# Altium PCB broken_sodimm_dq_widths.PcbDoc (part 6 of 7)
Units mm, origin at the board's own origin, x right, y up, seen from the top; angles counter-clockwise.
Board outline 69.63 x 30.03 mm, 8 copper layers (TOP, SPLIT2, S3, VDD4, S5, S6, SPLIT7, BOTTOM), stack 1.2 mm thick; 199 components, 229 nets, 1321 pads, 785 vias.
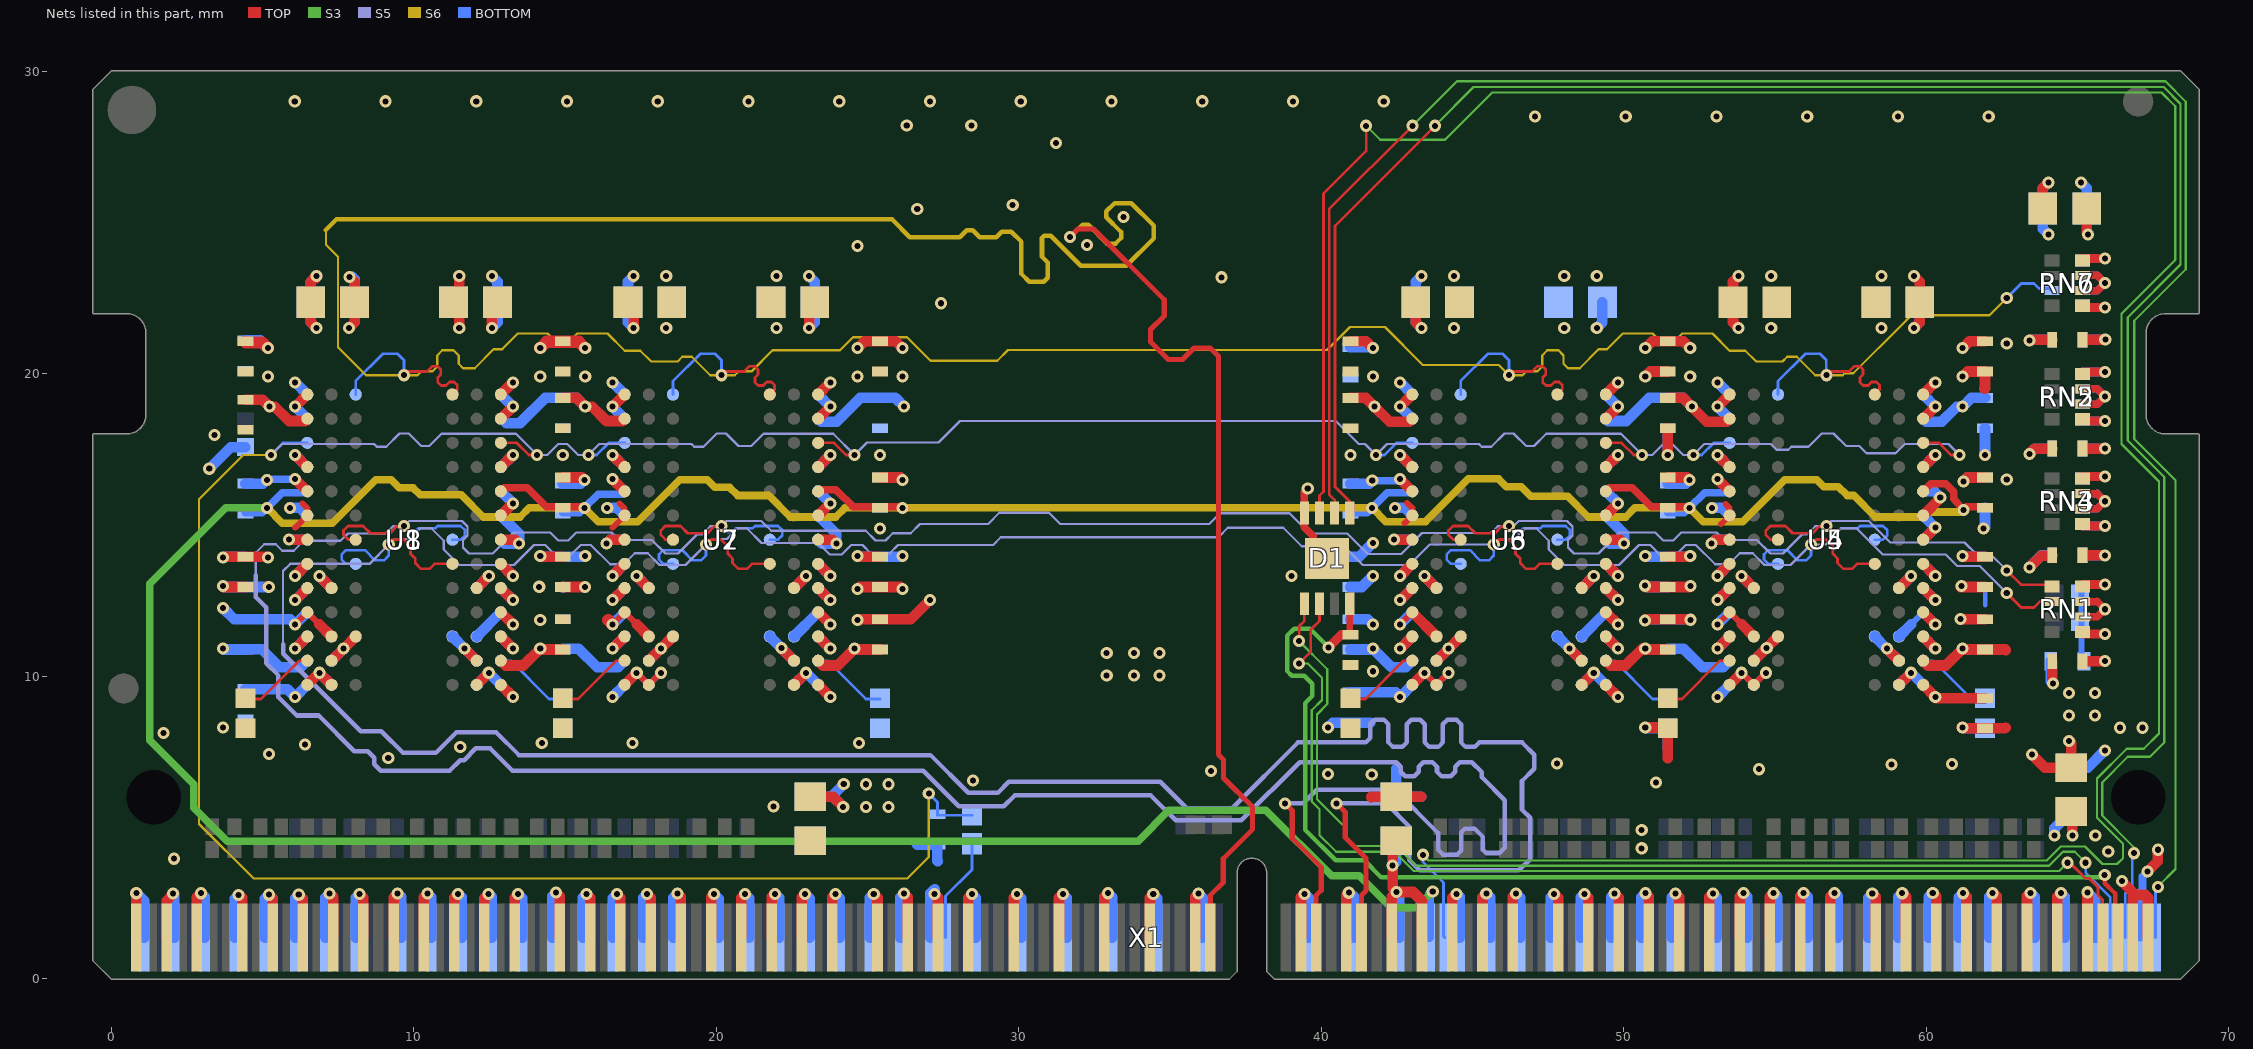
[diagram p11: the nets of this part, all layers, seen from the top]

## Via types
v1: diameter 0.4, hole 0.2, TOP to BOTTOM, tented both sides, 785 vias

## Nets (pads, with @x,y where several pads share a name; then routed paths per layer and width w, separated by ;. In a path a pad name is that pad's centre, name@x,y a point inside that pad or via, vN(x,y) a via of type N, cw(c..) or ccw(c..) an arc to the next point about the centre after c; other vN are vias at no path point) (continued)
GND: C1.2 C2.1 C13.1 C14.1 C15.1 C16.1 C17.1 C18.1 C19.1 C20.1 C21.1 C22.1 C30.1 C31.1 C32.1 C33.1 C34.1 C35.1 C36.1 C37.1 C38.1 C39.1 C40.1 C41.1 C42.1 C43.1 C44.1 C45.1 C46.1 C47.1 C48.1 C49.1 C50.1 C51.1 C52.1 C53.1 C54.1 C55.1 C58.1 C59.1 C60.1 C61.1 C62.1 C63.1 C64.1 C65.1 C66.1 C67.1 C68.1 C69.1 C70.1 C71.1 C72.1 C73.1 C74.1 C75.1 C76.1 C77.1 C78.1 C79.1 C80.1 C81.1 D1.4 D1.9 R94.1 R95.1 R96.1 R97.1 R98.1 R99.1 R100.1 R101.1 U1.A2 U1.A8 U1.A9 U1.C8 U1.D1 U1.D9 U1.E1 U1.E9 U1.G1 U1.G9 U1.H9 U1.K1 U1.K9 U1.N1 U2.A2 U2.A8 U2.A9 U2.C8 U2.D1 U2.D9 U2.E1 U2.E9 U2.G1 U2.G9 U2.H9 U2.K1 U2.K9 U2.N1 U3.A2 U3.A8 U3.A9 U3.C8 U3.D1 U3.D9 U3.E1 U3.E9 U3.G1 U3.G9 U3.H9 U3.K1 U3.K9 U3.N1 U4.A2 U4.A8 U4.A9 U4.C8 U4.D1 U4.D9 U4.E1 U4.E9 U4.G1 U4.G9 U4.H9 U4.K1 U4.K9 U4.N1 U5.A2 U5.A8 U5.A9 U5.C8 U5.D1 U5.D9 U5.E1 U5.E9 U5.G1 U5.G9 U5.H9 U5.K1 U5.K9 U5.N1 U6.A2 U6.A8 U6.A9 U6.C8 U6.D1 U6.D9 U6.E1 U6.E9 U6.G1 U6.G9 U6.H9 U6.K1 U6.K9 U6.N1 U7.A2 U7.A8 U7.A9 U7.C8 U7.D1 U7.D9 U7.E1 U7.E9 U7.G1 U7.G9 U7.H9 U7.K1 U7.K9 U7.N1 U8.A2 U8.A8 U8.A9 U8.C8 U8.D1 U8.D9 U8.E1 U8.E9 U8.G1 U8.G9 U8.H9 U8.K1 U8.K9 U8.N1 X1.1 X1.2 X1.5 X1.6 X1.9 X1.10 X1.14 X1.15 X1.18 X1.19 X1.22 X1.23 X1.26 X1.27 X1.30 X1.31 X1.35 X1.36 X1.39 X1.40 X1.43 X1.44 X1.47 X1.48 X1.51 X1.52 X1.56 X1.57 X1.60 X1.61 X1.64 X1.65 X1.68 X1.69 X1.72 X1.73 X1.77 X1.78 X1.81 X1.82 X1.85 X1.86 X1.89 X1.90 X1.93 X1.94 X1.98 X1.99 X1.102 X1.103 X1.106 X1.107 X1.167 X1.168 X1.171 X1.172 X1.175 X1.176 X1.180 X1.181 X1.184 X1.185 X1.188 X1.189 X1.192 X1.193 X1.196 X1.197 X1.201 X1.202 X1.205 X1.206 X1.209 X1.210 X1.213 X1.214 X1.217 X1.218 X1.222 X1.223 X1.226 X1.227 X1.230 X1.231 X1.234 X1.235 X1.238 X1.239 X1.243 X1.244 X1.247 X1.248 X1.251 X1.252 | length 267.1
  TOP w0.2: v1(6.073,11.717) U1.D9@6.473,12.117 6.873,11.717 ; 6.073,14.917 U1.H9@6.473,15.317 6.473,15.555 6.318,15.71 ; v1(16.563,11.717) U2.D9@16.963,12.117 17.363,11.717 ; 16.563,14.917 U2.H9@16.963,15.317 16.963,15.545 16.793,15.715 ; v1(17.363,10.117) U2.A8@17.763,9.717 v1(18.163,10.117) ; v1(42.603,11.717) U3.D9@43.003,12.117 ; 42.753,15.067 U3.H9@43.003,15.317 43.003,15.556 42.833,15.726 ; v1(43.403,10.117) U3.A8@43.803,9.717 v1(44.203,10.117) ; v1(53.093,11.717) U4.D9@53.493,12.117 53.893,11.717 ; 53.212,15.036 U4.H9@53.493,15.317 53.493,15.56 53.351,15.702 ; v1(53.893,10.117) U4.A8@54.293,9.717 v1(54.693,10.117)
  TOP w0.25: v1(39.548,16.206) 39.436,16.094 39.436,14.923 39.73,14.629 39.73,14.353 D1.9@40.186,13.897
  TOP w0.35: v1(0.82,2.83) 0.825,2.825 X1.1@0.825,1.365 ; X1.5@1.825,1.365 1.825,2.585 2.03,2.79 v1(2.03,2.82) ; X1.9@2.825,1.365 2.825,2.695 v1(2.96,2.83) ; v1(3.685,12.982) 3.715,12.952 C59.1@4.428,12.952 ; v1(4.2,2.77) 4.23,2.77 4.325,2.675 X1.15@4.325,1.365 ; v1@5.169,12.98 v1@5.171,12.982 ; v1(5.21,2.78) 5.325,2.665 X1.19@5.325,1.365 ; v1(5.873,14.517) U1.G9@6.473,14.517 ; v1(6.073,12.517) U1.E9@6.473,12.917 ; v1(6.073,17.317) U1.K9@6.473,16.917 ; v1(6.19,2.78) 6.325,2.645 X1.23@6.325,1.365 ; U1.A9@6.473,9.717 v1(6.873,10.117) U1.A8@7.273,9.717 ; 6.873,11.717 U1.C8@7.273,11.317 ; v1(7.21,2.82) 7.325,2.705 X1.27@7.325,1.365 ; v1(7.849,21.512) 8.036,21.699 C31.1@8.036,22.37 8.036,23.045 v1(7.874,23.207) ; v1(8.2,2.81) 8.325,2.685 X1.31@8.325,1.365 ; X1.35@9.325,1.365 9.325,2.685 v1(9.46,2.82) ; X1.39@10.325,1.365 10.325,2.695 v1(10.45,2.82) ; C14.1@11.273,22.37 11.497,22.594 v1(11.497,23.228) ; C14.1@11.31,22.37 11.497,22.183 v1(11.497,21.512) ; X1.43@11.325,1.365 11.325,2.675 v1(11.46,2.81) ; U1.A2@12.073,9.717 v1(12.473,10.117) ; X1.47@12.325,1.365 12.325,2.665 v1(12.47,2.81) ; U1.D1@12.873,12.117 v1(13.273,11.717) ; U1.E1@12.873,12.917 v1(13.273,12.517) ; U1.G1@12.873,14.517 13.348,14.517 v1(13.473,14.392) ; U1.K1@12.873,16.917 v1(13.273,17.317) ; U1.N1@12.873,19.317 v1(13.273,19.717) ; X1.51@13.325,1.365 13.325,2.685 v1(13.44,2.8) ; v1(14.7,2.85) 14.825,2.725 X1.57@14.825,1.365 ; C60.1@14.918,12.952 v1(15.65,12.95) ; v1(15.7,2.8) 15.825,2.675 X1.61@15.825,1.365 ; v1(16.363,14.392) 16.488,14.517 U2.G9@16.963,14.517 ; v1(16.563,12.517) U2.E9@16.963,12.917 ; v1(16.563,17.317) U2.K9@16.963,16.917 ; v1(16.71,2.8) 16.825,2.685 X1.65@16.825,1.365 ; U2.A9@16.963,9.717 v1(17.363,10.117) ; 17.363,11.717 U2.C8@17.763,11.317 ; v1(17.7,2.81) 17.825,2.685 X1.69@17.825,1.365 ; v1(18.71,2.82) 18.825,2.705 X1.73@18.825,1.365 ; X1.77@19.825,1.365 19.825,2.705 v1(19.92,2.8) ; X1.81@20.825,1.365 20.825,2.685 v1(20.94,2.8) ; X1.85@21.825,1.365 21.825,2.715 21.92,2.81 v1(21.94,2.81) ; U2.A2@22.563,9.717 v1(22.963,10.117) ; X1.89@22.825,1.365 22.825,2.695 v1(22.93,2.8) ; U2.D1@23.363,12.117 v1(23.763,11.717) ; U2.E1@23.363,12.917 v1(23.763,12.517) ; U2.G1@23.363,14.517 23.838,14.517 v1(23.963,14.392) ; U2.K1@23.363,16.917 v1(23.763,17.317) ; U2.N1@23.363,19.317 v1(23.763,19.717) ; X1.93@23.825,1.365 23.825,2.695 v1(23.93,2.8) ; v1(24.665,11.857) 24.695,11.887 C43.1@25.408,11.887 26.423,11.887 v1(27.053,12.517) ; v1(24.665,12.882) 24.735,12.952 C62.1@25.408,12.952 26.081,12.952 v1(26.151,12.882) ; v1(25.2,2.8) 25.325,2.675 X1.99@25.325,1.365 ; v1(26.2,2.82) 26.325,2.695 X1.103@26.325,1.365 ; v1(27.21,2.8) 27.325,2.685 X1.107@27.325,1.365 ; 41.65,6.01 41.658,6.018 C16.1@42.47,6.018 43.288,6.018 43.29,6.02 ; v1(42.403,14.517) U3.G9@43.003,14.517 ; v1(42.603,12.517) U3.E9@43.003,12.917 ; v1(42.603,17.317) U3.K9@43.003,16.917 ; U3.A9@43.003,9.717 v1(43.403,10.117) ; U3.D9@43.003,12.117 U3.C8@43.803,11.317 ; X1.167@44.325,1.365 44.325,2.675 v1(44.46,2.81) ; X1.171@45.325,1.365 45.325,2.695 v1(45.45,2.82) ; X1.175@46.325,1.365 46.325,2.715 v1(46.43,2.82) ; v1(47.69,2.81) 47.825,2.675 X1.181@47.825,1.365 ; U3.A2@48.603,9.717 v1(49.003,10.117) ; v1(48.69,2.81) 48.825,2.675 X1.185@48.825,1.365 ; U3.D1@49.403,12.117 v1(49.803,11.717) ; U3.E1@49.403,12.917 v1(49.803,12.517) ; U3.G1@49.403,14.517 49.878,14.517 v1(50.003,14.392) ; U3.K1@49.403,16.917 v1(49.803,17.317) ; U3.N1@49.403,19.317 v1(49.803,19.717) ; v1(49.69,2.82) 49.825,2.685 X1.189@49.825,1.365 ; v1(50.691,11.843) 50.691,11.856 50.722,11.887 C46.1@51.448,11.887 52.187,11.887 v1(52.205,11.869) ; v1(50.705,8.309) 51.418,8.309 R100.1@51.448,8.279 51.448,7.292 ; v1(50.705,19.908) 50.875,20.078 C66.1@51.448,20.078 ; v1(50.71,2.83) 50.825,2.715 X1.193@50.825,1.365 ; v1@50.779,12.952 C67.1@51.448,12.952 52.166,12.952 v1(52.202,12.988) ; v1(51.448,17.317) C45.1@51.448,18.203 ; v1(51.7,2.82) 51.825,2.695 X1.197@51.825,1.365 ; X1.201@52.825,1.365 52.825,2.705 v1(52.94,2.82) ; v1(52.893,14.392) 53.018,14.517 U4.G9@53.493,14.517 ; v1(53.093,12.517) U4.E9@53.493,12.917 ; v1(53.093,17.317) U4.K9@53.493,16.917 ; U4.A9@53.493,9.717 v1(53.893,10.117) ; X1.205@53.825,1.365 53.825,2.715 v1(53.948,2.838) ; 53.893,11.717 U4.C8@54.293,11.317 ; X1.209@54.825,1.365 54.825,2.705 v1(54.95,2.83) ; X1.213@55.825,1.365 55.825,2.725 v1(55.94,2.84) ; X1.217@56.825,1.365 56.825,2.705 v1(56.96,2.84) ; v1(58.21,2.82) 58.325,2.705 X1.223@58.325,1.365 ; U4.A2@59.093,9.717 v1(59.493,10.117) ; v1(59.2,2.83) 59.325,2.705 X1.227@59.325,1.365 ; U4.D1@59.893,12.117 v1(60.293,11.717) ; U4.E1@59.893,12.917 v1(60.293,12.517) ; U4.G1@59.893,14.517 v1(60.293,14.917) ; U4.K1@59.893,16.917 v1(60.293,17.317) ; U4.N1@59.893,19.317 v1(60.293,19.717) ; v1(60.21,2.84) 60.325,2.725 X1.231@60.325,1.365 ; v1(61.13,11.89) 61.133,11.887 C47.1@61.938,11.887 ; v1(61.16,12.982) 61.142,12.982 61.14,12.98 61.14,12.95 61.142,12.952 C69.1@61.938,12.952 ; v1(61.195,8.309) 61.225,8.279 C78.1@61.938,8.279 62.593,8.279 62.615,8.301 ; v1(61.195,19.908) 61.365,20.078 C68.1@61.938,20.078 61.938,19.517 61.921,19.5 ; v1(61.21,2.83) 61.325,2.715 X1.235@61.325,1.365 ; v1(62.19,2.83) 62.22,2.83 62.325,2.725 X1.239@62.325,1.365 ; X1.243@63.325,1.365 63.325,2.725 v1(63.44,2.84) ; v1(63.49,7.41) 63.92,6.98 C30.1@64.787,6.98 64.787,7.799 v1(64.719,7.867) ; X1.247@64.325,1.365 64.325,2.715 v1(64.45,2.84) ; v1(65.32,2.86) 65.325,2.855 X1.251@65.325,1.365
  TOP w0.4: v1@16.423,11.857 v1(16.563,11.717) ; C32.1@18.389,22.196 18.563,22.37 C32.1@18.389,22.544 ; C15.1@21.937,22.196 21.763,22.37 C15.1@21.937,22.544 ; D1.9@39.799,13.51 D1.9@40.186,13.897 D1.9@40.511,13.572
  BOTTOM w0.15: v1@61.13,12.97 61.148,12.952 C73.1@61.938,12.952 61.938,12.347
  BOTTOM w0.2: U8.D9@12.873,12.117 v1(13.273,11.717) ; v1(17.363,10.117) U7.A2@17.763,9.717 v1(18.163,10.117) ; U7.D9@23.363,12.117 v1(23.763,11.717) ; v1(43.403,10.117) U6.A2@43.803,9.717 v1(44.203,10.117) ; U6.D9@49.403,12.117 v1(49.803,11.717) ; v1(53.893,10.117) U5.A2@54.293,9.717 v1(54.693,10.117) ; 59.493,11.717 U5.D9@59.893,12.117 v1(60.293,11.717)
  BOTTOM w0.35: v1@0.825,2.825 1.075,2.575 X1.2@1.075,1.365 ; v1(2.03,2.82) 2.06,2.82 2.075,2.805 X1.6@2.075,1.365 ; v1@2.98,2.83 v1(2.96,2.83) 3.075,2.715 X1.10@3.075,1.365 ; v1(3.685,12.257) 4.055,11.887 C55.1@4.428,11.887 5.903,11.887 v1(6.073,11.717) U8.D1@6.473,12.117 ; v1(3.685,12.982) 3.715,12.952 C64.1@4.428,12.952 5.198,12.952 v1(5.2,12.95) ; X1.14@4.075,1.365 4.075,2.645 v1(4.2,2.77) ; X1.18@5.075,1.365 5.075,2.645 v1(5.21,2.78) ; v1(5.873,14.517) U8.G1@6.473,14.517 ; v1(6.073,12.517) U8.E1@6.473,12.917 ; v1(6.073,17.317) U8.K1@6.473,16.917 ; v1(6.073,19.717) U8.N1@6.473,19.317 ; X1.22@6.075,1.365 6.075,2.665 v1(6.19,2.78) ; v1(6.873,10.117) U8.A2@7.273,9.717 ; X1.26@7.075,1.365 7.075,2.685 v1(7.21,2.82) ; v1(7.874,23.207) 7.955,23.207 8.036,23.126 C35.1@8.036,22.37 ; X1.30@8.075,1.365 8.075,2.685 v1(8.2,2.81) ; v1(9.46,2.82) 9.575,2.705 X1.36@9.575,1.365 ; v1(10.45,2.82) 10.575,2.695 X1.40@10.575,1.365 ; v1(11.46,2.81) 11.575,2.695 X1.44@11.575,1.365 ; U8.A8@12.073,9.717 v1(12.473,10.117) U8.A9@12.873,9.717 ; U8.C8@12.073,11.317 U8.D9@12.873,12.117 ; v1(12.47,2.81) 12.575,2.705 X1.48@12.575,1.365 ; U8.E9@12.873,12.917 v1(13.273,12.517) ; U8.G9@12.873,14.517 12.998,14.392 v1(13.473,14.392) 13.473,14.717 U8.H9@12.873,15.317 ; U8.K9@12.873,16.917 v1(13.273,17.317) ; v1(13.44,2.8) 13.575,2.665 X1.52@13.575,1.365 ; v1(14.14,12.96) v1@14.148,12.952 ; X1.56@14.575,1.365 14.575,2.725 v1(14.7,2.85) ; C79.1@14.918,12.952 C79.1@14.934,12.936 ; X1.60@15.575,1.365 15.575,2.675 v1(15.7,2.8) ; v1@15.636,12.936 v1(15.65,12.95) ; v1(16.363,14.392) 16.488,14.517 U7.G1@16.963,14.517 ; v1(16.563,11.717) U7.D1@16.963,12.117 ; v1(16.563,12.517) U7.E1@16.963,12.917 ; v1(16.563,17.317) U7.K1@16.963,16.917 ; v1(16.563,19.717) U7.N1@16.963,19.317 ; X1.64@16.575,1.365 16.575,2.665 v1(16.71,2.8) ; X1.68@17.575,1.365 17.575,2.685 v1(17.7,2.81) ; X1.72@18.575,1.365 18.575,2.685 v1(18.71,2.82) ; v1(19.92,2.8) 20.075,2.645 X1.78@20.075,1.365 ; v1(20.94,2.8) 21.075,2.665 X1.82@21.075,1.365 ; v1(21.94,2.81) 22.075,2.675 X1.86@22.075,1.365 ; U7.A8@22.563,9.717 v1(22.963,10.117) U7.A9@23.363,9.717 ; U7.C8@22.563,11.317 U7.D9@23.363,12.117 ; v1(22.93,2.8) 23.075,2.655 X1.90@23.075,1.365 ; U7.E9@23.363,12.917 v1(23.763,12.517) ; U7.G9@23.363,14.517 23.488,14.392 v1(23.963,14.392) 23.963,14.717 U7.H9@23.363,15.317 ; U7.K9@23.363,16.917 v1(23.763,17.317) ; v1(23.93,2.8) 24.075,2.655 X1.94@24.075,1.365 ; X1.98@25.075,1.365 25.075,2.675 v1(25.2,2.8) ; X1.102@26.075,1.365 26.075,2.695 v1(26.2,2.82) ; 26.625,4.457 26.645,4.437 C1.2@27.305,4.437 27.305,3.903 27.315,3.893 ; X1.106@27.075,1.365 27.075,2.825 v1@27.21,2.96 ; v1(40.215,8.309) 40.373,8.467 C81.1@40.958,8.467 41.608,8.467 41.61,8.465 ; C51.1@40.958,11.887 41.531,11.887 v1(41.701,11.717) ; C70.1@40.958,12.952 41.336,12.952 v1(41.701,13.317) ; v1(42.403,14.517) U6.G1@43.003,14.517 ; 42.47,6.948 C13.1@42.47,6.018 43.291,6.018 ; v1(42.603,11.717) U6.D1@43.003,12.117 ; v1(42.603,12.517) U6.E1@43.003,12.917 ; v1(42.603,17.317) U6.K1@43.003,16.917 ; v1(42.603,19.717) U6.N1@43.003,19.317 ; v1(44.46,2.81) 44.48,2.81 44.575,2.715 X1.168@44.575,1.365 ; v1(45.45,2.82) 45.575,2.695 X1.172@45.575,1.365 ; v1(46.43,2.82) 46.575,2.675 X1.176@46.575,1.365 ; X1.180@47.575,1.365 47.575,2.695 v1(47.69,2.81) ; X1.184@48.575,1.365 48.575,2.695 v1(48.69,2.81) ; U6.A8@48.603,9.717 v1(49.003,10.117) U6.A9@49.403,9.717 ; U6.C8@48.603,11.317 U6.D9@49.403,12.117 ; U6.E9@49.403,12.917 v1(49.803,12.517) ; U6.G9@49.403,14.517 49.528,14.392 v1(50.003,14.392) 50.003,14.717 U6.H9@49.403,15.317 ; U6.K9@49.403,16.917 v1(49.803,17.317) ; X1.188@49.575,1.365 49.575,2.705 v1(49.69,2.82) ; X1.192@50.575,1.365 50.575,2.695 v1(50.71,2.83) ; v1(50.69,12.995) 50.733,12.952 C72.1@51.448,12.952 ; v1(50.691,11.843) 50.736,11.887 C53.1@51.448,11.887 52.187,11.887 v1(52.205,11.869) ; v1(50.705,8.309) 50.735,8.279 R99.1@51.448,8.279 51.448,7.622 ; v1(51.448,17.317) C52.1@51.448,18.203 ; X1.196@51.575,1.365 51.575,2.695 v1(51.7,2.82) ; v1(52.893,14.392) 53.018,14.517 U5.G1@53.493,14.517 ; v1(52.94,2.82) 53.075,2.685 X1.202@53.075,1.365 ; v1(53.093,11.717) U5.D1@53.493,12.117 ; v1(53.093,12.517) U5.E1@53.493,12.917 ; v1(53.093,17.317) U5.K1@53.493,16.917 ; v1(53.093,19.717) U5.N1@53.493,19.317 ; v1(53.948,2.838) 54.075,2.711 X1.206@54.075,1.365 ; v1(54.95,2.83) 55.075,2.705 X1.210@55.075,1.365 ; v1(55.94,2.84) 56.075,2.705 X1.214@56.075,1.365 ; v1(56.96,2.84) 57.075,2.725 X1.218@57.075,1.365 ; X1.222@58.075,1.365 58.075,2.685 v1(58.21,2.82) ; X1.226@59.075,1.365 59.075,2.705 v1(59.2,2.83) ; U5.A8@59.093,9.717 v1(59.493,10.117) U5.A9@59.893,9.717 ; U5.C8@59.093,11.317 59.493,11.717 ; U5.E9@59.893,12.917 v1(60.293,12.517) ; U5.G9@59.893,14.517 v1(60.293,14.917) U5.H9@59.893,15.317 ; U5.K9@59.893,16.917 v1(60.293,17.317) ; X1.230@60.075,1.365 60.075,2.705 v1(60.21,2.84) ; X1.234@61.075,1.365 61.075,2.695 v1(61.21,2.83) ; v1@61.13,12.97 61.142,12.982 v1(61.16,12.982) ; v1(61.195,8.309) 61.225,8.279 R101.1@61.938,8.279 ; v1(61.888,14.885) 61.938,14.935 C76.1@61.938,15.572 ; v1(61.938,17.317) C54.1@61.938,18.203 ; X1.238@62.075,1.365 62.075,2.715 v1(62.19,2.83) ; v1(63.44,2.84) 63.575,2.705 X1.244@63.575,1.365 ; v1(64.45,2.84) 64.575,2.715 X1.248@64.575,1.365 ; v1(65.112,26.327) 65.299,26.14 C22.1@65.299,25.469 ; v1(65.32,2.86) 65.575,2.605 X1.252@65.575,1.365
  BOTTOM w0.4: R95.1@14.918,8.279 R95.1@14.918,8.309
  other v1: 2.061,3.97 21.88,5.7 51.058,6.485 41.663,6.76 54.462,6.929 58.845,7.091 47.784,7.116 60.84,7.103 9.15,7.298 5.212,7.427 11.529,7.667 6.397,7.746 14.225,7.797 17.225,7.797 24.715,7.797 1.72,8.13 3.685,8.309 41.701,10.167 14.175,11.857 39.011,13.317 25.408,14.886 62.656,16.503 14.918,17.317 25.408,17.317 40.958,17.317 3.408,17.977 5.171,19.908 14.175,19.908 15.661,19.908 24.665,19.908 26.151,19.908 41.701,19.908 52.191,19.908 62.656,21.003 18.339,21.512 21.987,21.512 44.379,21.512 48.027,21.512 54.869,21.512 58.517,21.512 18.339,23.228 21.987,23.228 44.379,23.228 48.027,23.228 54.869,23.228 58.517,23.228 47.059,28.51 50.059,28.51 53.059,28.51 56.059,28.51 59.059,28.51 62.059,28.51 6.059,29.01 9.059,29.01 12.059,29.01 15.059,29.01 18.059,29.01 21.059,29.01 24.059,29.01 27.059,29.01 30.059,29.01 33.059,29.01 36.059,29.01 39.059,29.01 42.059,29.01
MEMRST: C1.1 R1.2 U1.L1 U2.L1 U3.L1 U4.L1 U5.L1 U6.L1 U7.L1 U8.L1 | length 115.2
  TOP w0.09: U1.L1@12.873,17.717 13.396,17.717 13.796,17.317 v1(14.073,17.317) ; U2.L1@23.363,17.717 23.886,17.717 24.286,17.317 v1(24.563,17.317) ; U3.L1@49.403,17.717 49.926,17.717 50.326,17.317 v1(50.603,17.317) ; U4.L1@59.893,17.717 60.416,17.717 60.816,17.317 v1(61.093,17.317)
  S5 w0.075: v1(5.273,17.317) 5.636,17.679 8.681,17.679 8.774,17.588 9.083,17.588 9.523,18.028 9.823,18.028 10.239,17.612 10.502,17.612 10.908,18.018 13.372,18.018 v1(14.073,17.317) 14.405,17.317 14.768,17.679 15.068,17.679 15.431,17.317 v1(15.763,17.317) 16.125,17.679 19.172,17.679 19.263,17.588 19.573,17.588 20.013,18.028 20.313,18.028 20.729,17.612 21.147,17.612 21.554,18.018 23.862,18.018 v1(24.563,17.317) 24.977,17.731 27.341,17.731 28.051,18.441 40.469,18.441 41.23,17.679 41.44,17.679 v1(41.803,17.317) 42.165,17.679 45.211,17.679 45.304,17.588 45.613,17.588 46.053,18.028 46.353,18.028 46.769,17.612 47.028,17.612 47.435,18.018 49.902,18.018 v1(50.603,17.317) 50.935,17.317 51.298,17.679 51.598,17.679 51.961,17.317 v1(52.293,17.317) 52.656,17.679 54.85,17.679 55.043,17.487 55.435,17.487 55.536,17.588 56.103,17.588 56.543,18.028 56.931,18.028 57.347,17.612 57.781,17.612 58.02,17.374 58.98,17.374 59.287,17.679 60.731,17.679 v1(61.093,17.317)
  S6 w0.075: v1(5.273,17.317) 4.358,17.317 2.892,15.851 2.892,5.121 4.7,3.313 26.305,3.313 27.019,4.026 v1(27.019,6.123)
  BOTTOM w0.09: v1(5.273,17.317) 5.673,17.717 U8.L1@6.473,17.717 ; v1(15.763,17.317) 16.04,17.317 16.44,17.717 U7.L1@16.963,17.717 ; v1(27.019,6.123) 27.305,5.837 C1.1@27.305,5.437 27.305,5.407 R1.2@28.449,5.407 ; v1(41.803,17.317) 42.08,17.317 42.48,17.717 U6.L1@43.003,17.717 ; v1(52.293,17.317) 52.57,17.317 52.97,17.717 U5.L1@53.493,17.717
NetC4_1: C4.1 R80.2 R85.2 | length 2.3
  BOTTOM w0.2: C4.1@65.127,10.5 R85.2@65.127,12.763
ODT0: RN1.2 U1.F3 U2.F3 U3.F3 U4.F3 U5.F3 U6.F3 U7.F3 U8.F3 X1.155 | length 159
  TOP w0.09: v1(9.167,14.357) 9.335,14.525 9.663,14.525 9.887,14.301 9.887,14.051 10.042,13.896 10.042,13.746 10.235,13.554 10.516,13.554 10.679,13.717 U1.F3@11.273,13.717 ; v1(19.657,14.357) 19.825,14.525 20.153,14.525 20.377,14.301 20.377,14.051 20.532,13.896 20.532,13.746 20.725,13.554 21.006,13.554 21.169,13.717 U2.F3@21.763,13.717 ; v1(45.697,14.357) 45.865,14.525 46.193,14.525 46.417,14.301 46.417,14.051 46.572,13.896 46.572,13.746 46.764,13.554 47.045,13.554 47.209,13.717 U3.F3@47.803,13.717 ; v1(56.187,14.357) 56.355,14.525 56.683,14.525 56.907,14.301 56.907,14.051 57.062,13.896 57.062,13.746 57.255,13.554 57.536,13.554 57.699,13.717 U4.F3@58.293,13.717 ; v1(62.656,12.753) 63.135,12.275 63.559,12.275 63.756,12.471 RN1.2@64.149,12.471
  TOP w0.17: v1(40.5,5.8) 40.789,5.511 40.789,4.673 41.474,3.988 41.474,2.908 41.325,2.759 X1.155@41.325,1.365
  S5 w0.075: 5.673,11.059 5.673,13.483 5.907,13.717 8.527,13.717 v1(9.167,14.357) 9.35,14.54 9.861,14.54 10.213,14.892 10.573,14.892 10.984,14.481 10.984,14.195 11.499,13.68 13.303,13.68 13.968,14.345 14.337,14.345 14.681,14.001 15.167,14.001 15.511,14.345 15.844,14.345 16.486,13.703 16.932,13.703 17.297,14.068 17.732,14.068 18.12,13.68 18.979,13.68 v1(19.657,14.357) 19.84,14.54 20.351,14.54 20.703,14.892 21.003,14.892 21.489,14.406 23.366,14.406 23.743,14.029 24.144,14.029 24.459,14.345 24.827,14.345 25.101,14.071 25.727,14.071 26.001,14.345 29.148,14.345 29.402,14.599 36.594,14.599 36.904,14.909 38.739,14.909 39.351,14.297 40.744,14.297 41.362,13.68 42.9,13.68 43.577,14.357 v1(45.697,14.357) 45.88,14.54 46.391,14.54 46.743,14.892 47.103,14.892 47.514,14.481 47.514,14.195 48.03,13.68 49.833,13.68 50.498,14.345 50.868,14.345 51.211,14.001 51.697,14.001 52.041,14.345 52.374,14.345 53.016,13.703 53.462,13.703 53.827,14.068 54.262,14.068 54.651,13.68 55.51,13.68 v1(56.187,14.357) 56.67,14.357 57.205,14.892 57.688,14.892 58.554,14.025 60.639,14.025 60.999,13.665 61.02,13.645 61.765,13.645 v1(62.656,12.753)
  S5 w0.15: 5.673,11.059 5.673,10.751 8.239,8.185 8.923,8.185 9.636,7.472 10.726,7.472 11.398,8.144 12.724,8.144 13.471,7.397 27.074,7.397 28.319,6.152 29.306,6.152 29.666,6.512 34.668,6.512 35.544,5.636 37.046,5.636 39.223,7.813 40.951,7.813 41.466,7.813 41.616,7.963 41.616,8.416 41.766,8.566 42.066,8.566 42.216,8.416 42.216,7.813 42.364,7.665 42.668,7.665 42.816,7.813 42.816,8.416 42.966,8.566 43.266,8.566 43.416,8.416 43.416,7.813 43.564,7.665 43.868,7.665 44.016,7.813 44.016,8.416 44.166,8.566 44.466,8.566 44.616,8.416 44.616,7.813 44.764,7.665 45.068,7.665 45.216,7.813 45.516,7.813 46.632,7.813 47.034,7.411 47.034,6.945 46.63,6.541 46.63,5.588 46.898,5.32 46.898,3.958 46.528,3.588 43.246,3.588 42.905,3.929 42.905,5.035 42.14,5.8 v1(40.5,5.8)
  BOTTOM w0.09: U8.F3@8.073,13.717 7.75,13.717 7.608,13.859 7.608,14.032 7.748,14.172 8.379,14.172 8.716,13.835 9.004,13.835 9.167,13.998 v1(9.167,14.357) ; U7.F3@18.563,13.717 18.24,13.717 18.098,13.859 18.098,14.032 18.238,14.172 18.869,14.172 19.206,13.835 19.494,13.835 19.657,13.998 v1(19.657,14.357) ; U6.F3@44.603,13.717 44.28,13.717 44.138,13.859 44.138,14.032 44.278,14.172 44.909,14.172 45.246,13.835 45.534,13.835 45.697,13.998 v1(45.697,14.357) ; U5.F3@55.093,13.717 54.77,13.717 54.628,13.859 54.628,14.032 54.768,14.172 55.399,14.172 55.736,13.835 56.024,13.835 56.187,13.998 v1(56.187,14.357)
PARITY: RN6.2 U1.N3 U2.N3 U3.N3 U4.N3 U5.N3 U6.N3 U7.N3 U8.N3 X1.143 | length 159.3
  TOP w0.09: v1(9.673,19.954) 9.793,20.074 10.426,20.074 10.607,20.255 10.777,20.255 10.886,20.146 10.886,19.976 10.787,19.877 10.787,19.72 10.892,19.616 11.058,19.616 11.171,19.729 11.329,19.729 11.429,19.629 11.429,19.474 U1.N3@11.273,19.317 ; v1(20.163,19.954) 20.283,20.074 20.916,20.074 21.097,20.255 21.267,20.255 21.376,20.146 21.376,19.976 21.277,19.877 21.277,19.72 21.382,19.616 21.548,19.616 21.661,19.729 21.819,19.729 21.919,19.629 21.919,19.474 U2.N3@21.763,19.317 ; v1(46.203,19.954) 46.323,20.074 46.956,20.074 47.137,20.255 47.307,20.255 47.416,20.146 47.416,19.976 47.317,19.877 47.317,19.72 47.422,19.616 47.588,19.616 47.701,19.729 47.859,19.729 47.96,19.629 47.96,19.474 U3.N3@47.803,19.317 ; v1(56.693,19.954) 56.813,20.074 57.446,20.074 57.627,20.255 57.797,20.255 57.906,20.146 57.906,19.976 57.807,19.877 57.807,19.72 57.912,19.616 58.078,19.616 58.191,19.729 58.349,19.729 58.449,19.629 58.449,19.474 U4.N3@58.293,19.317
  TOP w0.17: v1(31.685,24.518) 31.954,24.787 32.466,24.787 34.802,22.451 34.802,21.914 34.349,21.461 34.349,21.059 34.934,20.474 35.411,20.474 35.79,20.853 36.326,20.853 36.6,20.579 36.6,7.41 36.765,7.245 36.765,6.637 37.726,5.676 37.726,4.942 36.754,3.97 36.754,3.188 36.325,2.759 X1.143@36.325,1.365
  S6 w0.075: 7.089,24.755 7.089,24.266 7.487,23.868 7.487,20.882 8.414,19.954 v1(9.673,19.954) 10.115,19.954 10.242,20.081 10.607,20.081 10.768,20.242 10.768,20.608 10.938,20.778 11.307,20.778 11.476,20.609 11.476,20.33 11.619,20.187 12.006,20.187 12.632,20.813 12.914,20.813 13.432,21.331 14.416,21.331 14.625,21.122 15.186,21.122 15.395,21.331 16.4,21.331 16.964,20.767 17.484,20.767 17.843,20.408 18.716,20.408 18.871,20.563 19.186,20.563 19.795,19.954 v1(20.163,19.954) 20.605,19.954 20.732,20.081 21.157,20.081 21.856,20.78 24.084,20.78 24.515,21.211 26.301,21.211 27.077,20.435 29.286,20.435 29.641,20.789 40.187,20.789 40.946,21.548 42.097,21.548 43.353,20.292 45.865,20.292 v1(46.203,19.954) 46.645,19.954 46.772,20.081 47.137,20.081 47.298,20.242 47.298,20.608 47.468,20.778 47.837,20.778 48.006,20.609 48.006,20.33 48.149,20.187 48.536,20.187 49.162,20.813 49.444,20.813 49.962,21.331 50.946,21.331 51.155,21.122 51.716,21.122 51.925,21.331 52.93,21.331 53.494,20.767 54.014,20.767 54.373,20.408 55.246,20.408 55.401,20.563 55.716,20.563 56.325,19.954 v1(56.693,19.954) 57.23,19.954 57.293,20.017 57.584,20.017 59.23,21.663 59.443,21.875 59.502,21.934 62.087,21.934 v1(62.656,22.503)
  S6 w0.15: 7.089,24.755 7.439,25.105 25.804,25.105 26.391,24.518 28.046,24.518 28.28,24.752 28.467,24.752 28.701,24.518 29.253,24.518 29.435,24.7 29.745,24.7 30.083,24.362 30.083,23.301 30.342,23.042 30.817,23.042 30.955,23.18 30.955,23.68 30.762,23.873 30.762,24.491 30.833,24.562 31.055,24.562 32.044,23.573 33.551,23.573 34.453,24.475 34.453,24.902 33.713,25.642 33.16,25.642 32.891,25.373 32.891,25.173 33.375,24.689 33.375,24.49 33.192,24.307 32.903,24.307 32.903,24.318 32.286,24.935 32.102,24.935 v1(31.685,24.518)
  BOTTOM w0.09: U8.N3@8.073,19.317 8.073,19.756 8.982,20.665 9.457,20.665 9.673,20.449 v1(9.673,19.954) ; U7.N3@18.563,19.317 18.563,19.756 19.472,20.665 19.947,20.665 20.163,20.449 v1(20.163,19.954) ; U6.N3@44.603,19.317 44.603,19.756 45.512,20.665 45.987,20.665 46.203,20.449 v1(46.203,19.954) ; U5.N3@55.093,19.317 55.093,19.756 56.002,20.665 56.477,20.665 56.693,20.449 v1(56.693,19.954) ; v1(62.656,22.503) 63.136,22.983 63.56,22.983 63.725,22.818 64.076,22.818 RN6.2@64.149,22.745
RESET_CONN: R1.1 X1.108 | length 3.5
  BOTTOM w0.09: X1.108@27.575,1.365 27.575,2.732 28.449,3.606 R1.1@28.449,4.462 R1.1@28.449,4.468
S0: RN1.1 U1.G7 U2.G7 U3.G7 U4.G7 U5.G7 U6.G7 U7.G7 U8.G7 X1.149 | length 158
  TOP w0.09: U1.G7@8.073,14.517 7.827,14.517 7.671,14.673 7.671,14.827 7.816,14.972 8.319,14.972 8.561,14.73 9.209,14.73 9.444,14.965 v1(9.673,14.965) ; U2.G7@18.563,14.517 18.317,14.517 18.161,14.673 18.161,14.827 18.306,14.972 18.809,14.972 19.051,14.73 19.699,14.73 19.934,14.965 v1(20.163,14.965) ; U3.G7@44.603,14.517 44.357,14.517 44.201,14.673 44.201,14.827 44.346,14.972 44.849,14.972 45.091,14.73 45.739,14.73 45.974,14.965 v1(46.203,14.965) ; U4.G7@55.093,14.517 54.847,14.517 54.691,14.673 54.691,14.827 54.836,14.972 55.339,14.972 55.581,14.73 56.229,14.73 56.464,14.965 v1(56.693,14.965) ; v1(62.656,13.503) 63.129,13.03 RN1.1@64.149,13.03
  TOP w0.17: v1(38.8,5.8) 39.033,5.567 39.033,4.647 39.994,3.686 39.994,2.929 39.825,2.759 X1.149@39.825,1.365
  S5 w0.075: 4.771,13.334 4.771,14.088 5.051,14.368 5.433,14.368 5.646,14.155 6.023,14.155 6.348,14.48 7.575,14.48 7.817,14.722 9.062,14.722 9.305,14.965 v1(9.673,14.965) 9.844,15.137 11.585,15.137 11.768,14.953 11.768,14.659 11.619,14.51 11.619,14.256 11.818,14.057 12.607,14.057 13.304,14.755 14.503,14.755 14.771,14.487 15.1,14.487 15.367,14.755 16.531,14.755 16.776,14.51 17.863,14.51 18.313,14.06 18.725,14.06 19.357,14.692 19.518,14.692 19.791,14.965 v1(20.163,14.965) 20.335,15.137 21.482,15.137 21.81,14.809 24.939,14.809 25.261,14.487 25.59,14.487 25.832,14.729 26.425,14.729 26.731,15.035 28.982,15.035 29.351,15.404 30.994,15.404 31.363,15.035 36.292,15.035 36.649,15.392 38.946,15.392 39.618,14.72 40.857,14.72 41.533,14.045 42.634,14.045 43.328,14.738 45.603,14.738 45.831,14.965 v1(46.203,14.965) 46.35,14.965 46.521,15.137 48.114,15.137 48.298,14.953 48.298,14.659 48.149,14.51 48.149,14.256 48.348,14.057 49.155,14.057 49.853,14.755 51.033,14.755 51.301,14.487 51.63,14.487 51.897,14.755 53.061,14.755 53.306,14.51 54.393,14.51 54.843,14.06 55.255,14.06 55.887,14.692 56.048,14.692 56.321,14.965 v1(56.693,14.965) 56.864,15.137 58.097,15.137 58.807,14.427 61.263,14.427 61.644,14.046 62.114,14.046 v1(62.656,13.503)
  S5 w0.15: 4.771,13.334 4.771,12.62 5.11,12.281 5.11,10.435 5.519,10.026 5.519,9.305 6.119,8.705 6.851,8.705 8.029,7.527 8.477,7.527 8.692,7.312 8.692,7.088 8.903,6.877 11.176,6.877 11.528,7.229 11.657,7.229 12.046,7.618 12.515,7.618 13.256,6.877 26.831,6.877 28.006,5.702 29.498,5.702 29.858,6.062 34.355,6.062 35.181,5.236 37.352,5.236 39.281,7.165 41.325,7.165 41.42,7.165 42.02,7.165 42.47,7.165 42.62,7.015 42.62,6.842 42.77,6.692 43.07,6.692 43.22,6.842 43.22,7.015 43.37,7.165 43.67,7.165 43.82,7.015 43.82,6.842 43.97,6.692 44.27,6.692 44.42,6.842 44.42,7.015 44.57,7.165 44.72,7.165 44.969,7.165 45.306,6.828 45.306,6.664 46.065,5.905 46.065,4.332 45.892,4.159 45.45,4.159 45.339,4.27 45.339,4.688 45.059,4.968 44.744,4.968 44.618,4.842 44.618,4.24 44.486,4.108 44.017,4.108 43.855,4.27 43.855,4.82 42.43,6.245 39.84,6.245 39.395,5.8 v1(38.8,5.8)
  BOTTOM w0.09: v1(9.673,14.965) 9.871,14.767 10.023,14.767 10.155,14.899 10.714,14.899 10.787,14.972 11.545,14.972 11.686,14.831 11.686,14.662 11.541,14.517 U8.G7@11.273,14.517 ; v1(20.163,14.965) 20.361,14.767 20.513,14.767 20.645,14.899 21.204,14.899 21.277,14.972 22.035,14.972 22.176,14.831 22.176,14.662 22.031,14.517 U7.G7@21.763,14.517 ; v1(46.203,14.965) 46.401,14.767 46.553,14.767 46.685,14.899 47.244,14.899 47.317,14.972 48.075,14.972 48.216,14.831 48.216,14.662 48.071,14.517 U6.G7@47.803,14.517 ; v1(56.693,14.965) 56.891,14.767 57.043,14.767 57.175,14.899 57.734,14.899 57.807,14.972 58.565,14.972 58.707,14.83 58.707,14.663 58.561,14.517 U5.G7@58.293,14.517
SA0: D1.1 X1.256 | length 70.5
  TOP w0.09: D1.1@40.936,15.347 40.936,15.776 40.445,16.267 40.445,24.893 v1(43.752,28.2)
  S3 w0.075: v1(43.752,28.2) 45.031,29.479 67.845,29.479 68.401,28.923 68.401,23.612 66.652,21.863 66.652,17.8 67.864,16.588 67.864,7.81 67.393,7.339 66.658,7.339 65.812,6.493 65.812,5.397 66.858,4.352 v1(66.858,4.152)
  BOTTOM w0.09: X1.256@66.575,1.365 66.575,2.822 66.805,3.052 66.805,4.099 v1(66.858,4.152)
SA1: D1.2 X1.260 | length 69.7
  TOP w0.09: D1.2@40.436,15.347 40.436,15.835 40.255,16.016 40.255,25.442 v1(43.013,28.2)
  S3 w0.075: v1(43.013,28.2) 44.484,29.671 67.902,29.671 68.576,28.997 68.576,23.461 66.872,21.757 66.872,17.848 68.237,16.483 68.237,3.627 v1(67.65,3.04)
  BOTTOM w0.09: X1.260@67.575,1.365 67.575,2.965 v1(67.65,3.04)
SA2: D1.3 X1.166 | length 95.7
  TOP w0.09: D1.3@39.936,15.347 D1.3@39.936,15.397 39.936,15.977 40.065,16.106 40.065,25.956 41.479,27.37 v1(41.479,28.2)
  S3 w0.075: v1(41.479,28.2) 41.942,27.737 44.081,27.737 45.648,29.304 67.771,29.304 68.226,28.849 68.226,23.763 66.452,21.989 66.452,17.677 67.689,16.44 67.689,8.109 67.185,7.605 66.623,7.605 65.637,6.62 65.637,5.325 66.496,4.467 66.496,3.986 66.302,3.793 65.821,3.793 65.239,4.374 64.441,4.374 63.979,3.913 43.54,3.913 v1(43.353,4.1)
  BOTTOM w0.09: v1(43.353,4.1) 43.351,3.865 44.037,3.179 44.037,1.403 X1.166@44.075,1.365
SCL: D1.6 X1.253 | length 37.1
  TOP w0.09: v1(39.262,10.42) 39.644,10.802 39.644,11.54 39.936,11.832 D1.6@39.936,12.397 D1.6@39.936,12.447 ; 65.149,3.429 65.258,3.32 65.38,3.32 ; X1.253@65.825,1.365 X1.253@65.825,2
  TOP w0.1: v1(64.664,3.837) 64.741,3.837 65.149,3.429 ; 65.38,3.32 65.67,3.03 65.67,2.758 65.825,2.603 X1.253@65.825,2
  S3 w0.075: v1(39.262,10.42) 39.549,10.42 40.02,9.95 40.02,9.218 39.678,8.876 39.678,5.862 39.937,5.602 39.937,4.75 40.486,4.201 42.415,4.201 43.053,3.562 64.39,3.562 v1(64.664,3.837)
SDA: D1.5 X1.254 | length 36.8
  TOP w0.09: v1(39.262,11.17) 39.262,11.655 39.436,11.829 D1.5@39.436,12.447
  S3 w0.075: v1(39.262,11.17) 40.195,10.237 40.195,9.084 39.853,8.742 39.853,5.935 40.784,5.003 40.784,4.688 41.083,4.389 42.474,4.389 43.126,3.738 64.052,3.738 64.514,4.2 64.902,4.2 v1(65.264,3.837)
  BOTTOM w0.09: v1(65.264,3.837) 65.264,3.509 66.075,2.698 X1.254@66.075,1.365
VDD: C4.2 C5.1 C6.1 C7.1 C8.1 C9.1 C10.1 C11.1 C12.1 C13.2 C14.2 C15.2 C16.2 C17.2 C18.2 C19.2 C20.2 C21.2 C22.2 C23.1 C24.1 C25.1 C26.1 C27.1 C28.1 C29.1 C56.1 C57.1 C58.2 C59.2 C60.2 C61.2 C62.2 C63.2 C64.2 C65.2 C66.2 C67.2 C68.2 C69.2 C70.2 C71.2 C72.2 C73.2 C74.2 C75.2 C76.2 C77.2 C78.2 C79.2 C80.2 C81.2 R2.2 U1.A1 U1.B2 U1.B8 U1.C1 U1.C7 U1.C9 U1.E2 U1.E8 U1.F1 U1.F9 U1.H1 U1.J9 U1.M1 U1.N9 U2.A1 U2.B2 U2.B8 U2.C1 U2.C7 U2.C9 U2.E2 U2.E8 U2.F1 U2.F9 U2.H1 U2.J9 U2.M1 U2.N9 U3.A1 U3.B2 U3.B8 U3.C1 U3.C7 U3.C9 U3.E2 U3.E8 U3.F1 U3.F9 U3.H1 U3.J9 U3.M1 U3.N9 U4.A1 U4.B2 U4.B8 U4.C1 U4.C7 U4.C9 U4.E2 U4.E8 U4.F1 U4.F9 U4.H1 U4.J9 U4.M1 U4.N9 U5.A1 U5.B2 U5.B8 U5.C1 U5.C7 U5.C9 U5.E2 U5.E8 U5.F1 U5.F9 U5.H1 U5.J9 U5.M1 U5.N9 U6.A1 U6.B2 U6.B8 U6.C1 U6.C7 U6.C9 U6.E2 U6.E8 U6.F1 U6.F9 U6.H1 U6.J9 U6.M1 U6.N9 U7.A1 U7.B2 U7.B8 U7.C1 U7.C7 U7.C9 U7.E2 U7.E8 U7.F1 U7.F9 U7.H1 U7.J9 U7.M1 U7.N9 U8.A1 U8.B2 U8.B8 U8.C1 U8.C7 U8.C9 U8.E2 U8.E8 U8.F1 U8.F9 U8.H1 U8.J9 U8.M1 U8.N9 X1.111 X1.112 X1.117 X1.118 X1.123 X1.124 X1.129 X1.130 X1.135 X1.136 X1.141 X1.142 X1.147 X1.148 X1.153 X1.154 X1.159 X1.160 X1.163 | length 153.2
  TOP w0.35: v1(3.685,13.922) 3.715,13.952 C59.2@4.428,13.952 5.141,13.952 v1(5.171,13.922) ; v1(6.073,10.917) U1.C9@6.473,11.317 ; v1(6.073,13.317) U1.F9@6.473,13.717 ; v1(6.073,16.517) U1.J9@6.473,16.117 ; v1(6.073,18.917) U1.N9@6.473,19.317 ; v1(6.873,13.317) U1.E8@7.273,12.917 ; U1.B8@7.273,10.517 v1(7.673,10.917) U1.C7@8.073,11.317 ; v1(11.673,10.917) U1.B2@12.073,10.517 ; U1.E2@12.073,12.917 v1(12.473,13.317) ; v1(12.573,21.512) 12.573,22.183 C14.2@12.76,22.37 ; U1.A1@12.873,9.717 v1(13.273,9.317) ; U1.C1@12.873,11.317 v1(13.273,10.917) ; U1.F1@12.873,13.717 v1(13.273,13.317) ; U1.H1@12.873,15.317 v1(13.273,15.717) ; U1.M1@12.873,18.517 v1(13.273,18.917) ; v1(14.175,13.982) 14.205,13.952 C60.2@14.918,13.952 ; C5.1@14.918,16.572 15.556,16.572 v1(15.636,16.492) ; v1(16.563,10.917) U2.C9@16.963,11.317 ; v1(16.563,13.317) U2.F9@16.963,13.717 ; v1(16.563,16.517) U2.J9@16.963,16.117 ; v1(16.563,18.917) U2.N9@16.963,19.317 ; v1(17.363,13.317) U2.E8@17.763,12.917 ; U2.B8@17.763,10.517 v1(18.163,10.917) U2.C7@18.563,11.317 ; v1(22.15,10.93) U2.B2@22.563,10.517 ; U2.E2@22.563,12.917 v1(22.963,13.317) ; v1(23.063,21.512) 23.063,22.183 C15.2@23.25,22.37 ; U2.A1@23.363,9.717 v1(23.763,9.317) ; U2.C1@23.363,11.317 v1(23.763,10.917) ; U2.F1@23.363,13.717 v1(23.763,13.317) ; U2.H1@23.363,15.317 v1(23.763,15.717) ; U2.M1@23.363,18.517 v1(23.763,18.917) ; v1(24.665,13.982) 24.695,13.952 C62.2@25.408,13.952 ; v1(24.665,20.848) 24.895,21.078 C61.2@25.408,21.078 25.921,21.078 v1(26.151,20.848) ; C6.1@25.408,16.572 26.071,16.572 v1(26.151,16.492) ; X1.111@28.325,1.365 28.325,2.685 v1(28.45,2.81) ; X1.117@29.825,1.365 29.825,2.685 v1(29.94,2.8) ; X1.123@31.325,1.365 31.325,2.685 v1(31.45,2.81) ; X1.129@32.825,1.365 32.825,2.715 v1(32.94,2.83) ; X1.135@34.325,1.365 34.325,2.685 v1(34.44,2.8) ; X1.141@35.825,1.365 35.825,2.715 v1(35.93,2.82) ; X1.147@39.325,1.365 39.325,2.695 v1(39.44,2.81) ; X1.153@40.825,1.365 40.825,2.767 v1(40.904,2.846) ; C65.2@40.958,21.078 41.471,21.078 v1(41.701,20.848) ; X1.159@42.325,1.365 42.325,2.715 v1(42.48,2.87) ; C16.2@42.47,4.568 42.353,4.451 v1(42.353,3.75) 42.353,2.997 v1(42.48,2.87) ; v1(42.603,10.917) U3.C9@43.003,11.317 ; v1(42.603,13.317) U3.F9@43.003,13.717 ; v1(42.603,16.517) U3.J9@43.003,16.117 ; v1(42.603,18.917) U3.N9@43.003,19.317 ; X1.163@43.325,1.365 43.325,2.573 43.028,2.87 v1(42.48,2.87) ; v1(43.403,13.317) U3.E8@43.803,12.917 ; U3.B8@43.803,10.517 v1(44.203,10.917) U3.C7@44.603,11.317 ; v1(48.203,10.917) U3.B2@48.603,10.517 ; U3.E2@48.603,12.917 v1(49.003,13.317) ; U3.A1@49.403,9.717 v1(49.803,9.317) ; U3.C1@49.403,11.317 v1(49.803,10.917) ; U3.F1@49.403,13.717 v1(49.803,13.317) ; U3.H1@49.403,15.317 v1(49.803,15.717) ; U3.M1@49.403,18.517 v1(49.803,18.917) ; v1(50.705,20.848) 50.935,21.078 C66.2@51.448,21.078 51.961,21.078 v1(52.191,20.848) ; C67.2@51.448,13.952 52.161,13.952 v1(52.191,13.982) ; C7.1@51.448,16.572 52.086,16.572 v1(52.166,16.492) ; v1(53.093,10.917) U4.C9@53.493,11.317 ; v1(53.093,13.317) U4.F9@53.493,13.717 ; v1(53.093,16.517) U4.J9@53.493,16.117 ; v1(53.093,18.917) U4.N9@53.493,19.317 ; v1(53.893,13.317) U4.E8@54.293,12.917 ; U4.B8@54.293,10.517 54.716,10.94 v1(54.72,10.94) 54.72,10.944 U4.C7@55.093,11.317 ; v1(58.693,10.917) U4.B2@59.093,10.517 ; U4.E2@59.093,12.917 v1(59.493,13.317) ; v1(59.593,21.512) 59.78,21.699 C17.2@59.78,22.37 59.78,23.041 v1(59.593,23.228) ; U4.A1@59.893,9.717 v1(60.293,9.317) 60.331,9.279 C78.2@61.938,9.279 ; U4.C1@59.893,11.317 v1(60.293,10.917) ; U4.F1@59.893,13.717 v1(60.293,13.317) ; U4.H1@59.893,15.317 60.458,15.882 v1(60.458,15.917) ; U4.M1@59.893,18.517 v1(60.293,18.917) ; v1(61.195,13.982) 61.225,13.952 C69.2@61.938,13.952 ; v1(61.195,20.848) 61.425,21.078 C68.2@61.938,21.078 ; v1(61.22,16.442) 61.35,16.572 C8.1@61.938,16.572 ; v1(63.406,13.601) 63.793,13.988 64.157,13.988 C25.1@64.157,14 ; v1(63.406,17.353) 63.583,17.53 C24.1@64.157,17.53 ; v1(63.406,21.103) 63.433,21.13 C23.1@64.157,21.13 ; C57.1@63.849,25.469 63.849,26.14 v1(64.036,26.327) ; C26.1@64.157,10.5 64.157,9.787 v1(64.187,9.757)
  TOP w0.4: C63.2@4.428,21.048 4.436,21.04 4.979,21.04 v1(5.171,20.848) ; C14.2@12.623,22.196 C14.2@12.778,22.351 ; v1(14.175,20.848) 14.387,21.06 15.449,21.06 v1(15.661,20.848)
  BOTTOM w0.254: v1@5.146,16.517 v1(6.073,16.517) ; v1(41.68,16.47) 42.556,16.47 v1(42.603,16.517)
  BOTTOM w0.35: v1(3.232,16.863) 3.947,17.578 R2.2@4.428,17.578 ; v1(3.685,13.922) 3.715,13.952 C64.2@4.428,13.952 ; C71.2@4.428,9.579 5.811,9.579 v1(6.073,9.317) U8.A1@6.473,9.717 ; C9.1@4.428,16.372 5.001,16.372 v1@5.146,16.517 ; C75.2@4.428,21.102 4.917,21.102 v1(5.171,20.848) ; v1(5.898,15.567) 6.223,15.567 U8.H1@6.473,15.317 ; v1(6.073,10.917) U8.C1@6.473,11.317 ; v1(6.073,13.317) U8.F1@6.473,13.717 ; v1(6.073,18.917) U8.M1@6.473,18.517 ; v1(6.873,13.317) U8.E2@7.273,12.917 ; U8.B2@7.273,10.517 v1(7.673,10.917) ; U8.C7@11.273,11.317 v1(11.673,10.917) U8.B8@12.073,10.517 ; U8.E8@12.073,12.917 v1(12.473,13.317) ; v1(12.573,21.512) 12.76,21.699 C18.2@12.76,22.37 12.76,23.041 v1(12.573,23.228) ; U8.C9@12.873,11.317 v1(13.273,10.917) ; U8.F9@12.873,13.717 v1(13.273,13.317) ; U8.J9@12.873,16.117 v1(13.273,15.717) ; U8.N9@12.873,19.317 v1(13.273,18.917) ; v1(14.175,13.982) 14.205,13.952 C79.2@14.918,13.952 15.631,13.952 v1(15.661,13.982) ; C10.1@14.918,16.372 15.516,16.372 v1(15.636,16.492) ; v1(16.388,15.567) 16.713,15.567 U7.H1@16.963,15.317 ; v1(16.563,9.317) U7.A1@16.963,9.717 ; v1(16.563,10.917) U7.C1@16.963,11.317 ; v1(16.563,13.317) U7.F1@16.963,13.717 ; v1(16.563,18.917) U7.M1@16.963,18.517 ; v1(17.363,13.317) U7.E2@17.763,12.917 ; U7.B2@17.763,10.517 v1(18.163,10.917) ; U7.C7@21.763,11.317 v1(22.15,10.93) U7.B8@22.563,10.517 ; U7.E8@22.563,12.917 v1(22.963,13.317) ; v1(23.063,21.512) 23.25,21.699 C19.2@23.25,22.37 23.25,23.041 v1(23.063,23.228) ; U7.C9@23.363,11.317 v1(23.763,10.917) ; U7.F9@23.363,13.717 v1(23.763,13.317) ; U7.J9@23.363,16.117 v1(23.763,15.717) ; U7.N9@23.363,19.317 v1(23.763,18.917) ; v1(24.665,13.982) 24.695,13.952 C80.2@25.408,13.952 26.121,13.952 v1(26.151,13.982) ; C74.2@25.408,16.572 26.071,16.572 v1(26.151,16.492) ; v1(28.45,2.81) 28.575,2.685 X1.112@28.575,1.365 ; v1(29.94,2.8) 30.075,2.665 X1.118@30.075,1.365 ; v1(31.45,2.81) 31.575,2.685 X1.124@31.575,1.365 ; v1(32.94,2.83) 33.075,2.695 X1.130@33.075,1.365 ; v1(34.44,2.8) 34.575,2.665 X1.136@34.575,1.365 ; v1(35.93,2.82) 36.075,2.675 X1.142@36.075,1.365 ; v1(39.44,2.81) 39.575,2.675 X1.148@39.575,1.365 ; v1(40.904,2.846) 40.934,2.846 41.075,2.705 X1.154@41.075,1.365 ; C81.2@40.958,9.467 42.453,9.467 v1(42.603,9.317) U6.A1@43.003,9.717 ; C70.2@40.958,13.952 41.246,13.952 v1(41.701,14.407) ; C11.1@40.958,16.372 41.582,16.372 v1(41.68,16.47) ; C77.2@40.958,20.878 41.671,20.878 v1(41.701,20.848) ; v1(42.353,3.75) 42.47,3.867 C13.2@42.47,4.568 ; v1(42.428,15.567) 42.753,15.567 U6.H1@43.003,15.317 ; v1(42.48,2.87) 42.575,2.775 X1.160@42.575,1.365 ; v1(42.603,10.917) U6.C1@43.003,11.317 ; v1(42.603,13.317) U6.F1@43.003,13.717 ; v1(42.603,18.917) U6.M1@43.003,18.517 ; v1(43.403,13.317) U6.E2@43.803,12.917 ; U6.B2@43.803,10.517 v1(44.203,10.917) ; U6.C7@47.803,11.317 v1(48.203,10.917) U6.B8@48.603,10.517 ; U6.E8@48.603,12.917 v1(49.003,13.317) ; v1(49.103,21.512) 49.29,21.699 C20.2@49.29,22.37 ; U6.C9@49.403,11.317 v1(49.803,10.917) ; U6.F9@49.403,13.717 v1(49.803,13.317) ; U6.J9@49.403,16.117 v1(49.803,15.717) ; U6.N9@49.403,19.317 v1(49.803,18.917) ; v1(50.705,13.982) 50.735,13.952 C72.2@51.448,13.952 52.161,13.952 v1(52.191,13.982) ; C12.1@51.448,16.372 52.046,16.372 v1(52.166,16.492) ; v1(52.918,15.567) 53.243,15.567 U5.H1@53.493,15.317 ; v1(53.093,9.317) U5.A1@53.493,9.717 ; v1(53.093,10.917) U5.C1@53.493,11.317 ; v1(53.093,13.317) U5.F1@53.493,13.717 ; v1(53.093,18.917) U5.M1@53.493,18.517 ; v1(53.893,13.317) U5.E2@54.293,12.917 ; U5.B2@54.293,10.517 54.716,10.94 v1(54.72,10.94) ; U5.C7@58.293,11.317 v1(58.693,10.917) U5.B8@59.093,10.517 ; U5.E8@59.093,12.917 v1(59.493,13.317) ; v1(59.593,21.512) 59.78,21.699 C21.2@59.78,22.37 ; U5.C9@59.893,11.317 v1(60.293,10.917) ; U5.F9@59.893,13.717 v1(60.293,13.317) ; U5.J9@59.893,16.117 60.258,16.117 v1(60.458,15.917) ; U5.N9@59.893,19.317 v1(60.293,18.917) ; v1(61.195,13.982) 61.225,13.952 C73.2@61.938,13.952 ; v1(61.22,16.442) 61.35,16.572 C76.2@61.938,16.572 ; v1(63.406,13.601) 63.805,14 C29.1@64.157,14 ; v1(63.406,17.353) 63.583,17.53 C28.1@64.157,17.53 ; v1(63.406,21.103) 63.433,21.13 C27.1@64.157,21.13 ; v1(64.036,24.611) 63.849,24.798 C22.2@63.849,25.469 63.849,26.14 v1(64.036,26.327) ; C4.2@64.107,10.5 64.107,9.837 v1(64.187,9.757) ; v1(64.233,4.737) 64.233,4.976 C56.1@64.787,5.53
  BOTTOM w0.4: C21.2@59.643,22.544 C21.2@59.798,22.389
  other v1: 28.484,6.553 40.219,6.765 36.355,6.865 5.146,16.492 27.429,22.333 36.692,23.192 49.103,23.228 24.66,24.225 32.254,24.264 33.453,25.187 26.638,25.452 29.794,25.585 31.22,27.627 26.29,28.205 28.424,28.205
VDDSPD: C2.2 D1.8 X1.255 | length 40.2
  TOP w0.15: v1(65.894,3.43) 65.894,3.163 66.236,2.821 66.236,1.454 X1.255@66.325,1.365
  TOP w0.2: D1.8@40.936,12.447 40.936,11.367 40.943,11.36 C2.2@40.958,11.345
  TOP w0.3: v1(40.235,10.957) 40.658,11.38 C2.2@40.923,11.38
  S3 w0.15: v1(40.235,10.957) 39.622,11.57 39.096,11.57 38.862,11.336 38.862,10.176 39.018,10.02 39.428,10.02 39.699,9.749 39.699,9.351 39.465,9.117 39.465,4.922 40.473,3.914 41.412,3.914 41.976,3.35 65.814,3.35 v1(65.894,3.43)
VPP: C30.2 C31.2 C32.2 C33.2 C34.2 C35.2 C36.2 C37.2 C38.2 C39.2 C40.2 C41.2 C42.2 C43.2 C44.2 C45.2 C46.2 C47.2 C48.2 C49.2 C50.2 C51.2 C52.2 C53.2 C54.2 C55.2 U1.B1 U1.M9 U2.B1 U2.M9 U3.B1 U3.M9 U4.B1 U4.M9 U5.B1 U5.M9 U6.B1 U6.M9 U7.B1 U7.M9 U8.B1 U8.M9 X1.257 X1.259 | length 62.6
  TOP w0.35: C40.2@4.428,19.147 4.993,19.147 v1(5.223,18.917) 5.401,18.917 5.876,18.442 6.398,18.442 U1.M9@6.473,18.517 ; v1@6.723,23.178 6.586,23.041 C31.2@6.586,22.37 6.586,21.699 v1(6.773,21.512) ; U1.B1@12.873,10.517 13.032,10.358 13.616,10.358 v1(14.175,10.917) 14.205,10.887 C42.2@14.918,10.887 ; C41.2@14.918,19.203 15.375,19.203 v1(15.661,18.917) 15.891,18.917 16.366,18.442 16.888,18.442 U2.M9@16.963,18.517 ; C32.2@17.076,22.37 17.263,22.183 v1(17.263,21.512) ; C39.2@23.1,6.018 23.854,6.018 v1(24.19,5.682) ; U2.B1@23.363,10.517 23.522,10.358 24.004,10.358 v1(24.563,10.917) 24.593,10.887 C43.2@25.408,10.887 ; C44.2@40.958,19.203 41.467,19.203 v1(41.753,18.917) 42.253,18.417 42.903,18.417 U3.M9@43.003,18.517 ; C33.2@43.116,22.37 43.116,21.699 v1(43.303,21.512) ; U3.B1@49.403,10.517 49.562,10.358 50.044,10.358 50.603,10.917 50.633,10.887 C46.2@51.448,10.887 ; C45.2@51.448,19.203 51.957,19.203 v1(52.243,18.917) 52.743,18.417 53.393,18.417 U4.M9@53.493,18.517 ; C34.2@53.606,22.37 53.606,21.699 v1@53.743,21.562 ; C34.2@53.606,22.407 53.606,23.041 v1@53.743,23.178 ; U4.B1@59.893,10.517 60.052,10.358 60.636,10.358 v1(61.195,10.917) 61.225,10.887 C47.2@61.938,10.887 62.605,10.887 62.628,10.864 ; C30.2@64.787,5.53 64.82,5.497 64.82,4.75 v1(64.833,4.737) ; v1(66.46,3.23) 66.825,2.865 ; X1.257@66.825,1.365 66.825,2.865 ; X1.259@67.325,1.365 67.325,2.675 67.23,2.77 66.92,2.77 66.825,2.865
  TOP w0.4: v1@6.723,23.178 v1(6.773,23.228)
  BOTTOM w0.35: v1(3.685,10.917) 3.715,10.887 C55.2@4.428,10.887 ; C55.2@4.445,10.9 4.455,10.89 4.97,10.89 5.562,10.298 6.254,10.298 U8.B1@6.473,10.517 ; v1(6.773,21.512) 6.586,21.699 C35.2@6.586,22.37 6.586,23.041 v1(6.773,23.228) ; U8.M9@12.937,18.494 13.058,18.373 13.505,18.373 14.335,19.203 C48.2@14.918,19.203 15.375,19.203 v1(15.661,18.917) ; v1(14.175,10.917) 14.205,10.887 C49.2@14.918,10.887 ; C49.2@14.918,10.917 15.44,10.917 16.059,10.298 16.744,10.298 U7.B1@16.963,10.517 ; v1(17.263,21.512) 17.076,21.699 C36.2@17.076,22.37 17.076,23.041 v1(17.263,23.228) ; C38.2@23.1,6.018 23.791,6.018 ; U7.M9@23.363,18.517 23.463,18.417 23.97,18.417 24.756,19.203 C50.2@25.408,19.203 25.917,19.203 v1(26.203,18.917) ; v1(24.19,5.682) 23.854,6.018 23.791,6.018 ; v1(24.208,6.435) 23.791,6.018 ; C51.2@40.958,10.887 41.671,10.887 v1(41.701,10.917) 41.704,10.917 42.318,10.303 42.789,10.303 U6.B1@43.003,10.517 ; v1(43.303,21.512) 43.116,21.699 C37.2@43.116,22.37 43.116,23.041 v1(43.303,23.228) ; U6.M9@49.403,18.517 49.478,18.442 50.08,18.442 50.841,19.203 C52.2@51.448,19.203 51.957,19.203 v1(52.243,18.917) ; v1(50.705,10.917) 50.735,10.887 C53.2@51.448,10.887 ; C53.2@51.448,10.917 51.97,10.917 52.589,10.298 53.274,10.298 U5.B1@53.493,10.517 ; U5.M9@59.893,18.517 59.993,18.417 60.5,18.417 61,18.917 v1(61.195,18.917) 61.481,19.203 C54.2@61.938,19.203
  other v1: 66.011,4.215 50.588,4.315 65.583,4.737 50.588,4.924 24.94,5.682 25.69,5.682 24.94,6.432 25.69,6.432 64.719,8.7 65.569,8.7 64.719,9.451 65.569,9.451 32.901,10.026 33.801,10.026 34.651,10.026 32.901,10.776 33.801,10.776 34.651,10.776 53.793,21.512 53.793,23.228
VREFCA: C5.2 C6.2 C7.2 C8.2 C9.2 C10.2 C11.2 C12.2 U1.J1 U2.J1 U3.J1 U4.J1 U5.J1 U6.J1 U7.J1 U8.J1 X1.164 | length 140.9
  TOP w0.25: U1.J1@12.873,16.117 12.984,16.228 13.746,16.228 14.372,15.602 15.586,15.602 v1(15.636,15.567) ; U2.J1@23.363,16.117 23.413,16.167 23.949,16.167 24.514,15.602 26.101,15.602 v1(26.151,15.567) ; U3.J1@49.403,16.117 49.514,16.228 50.276,16.228 50.902,15.602 52.116,15.602 v1(52.166,15.567) ; U4.J1@59.893,16.117 60.143,16.367 60.644,16.367 60.908,16.103 60.908,15.864 v1(61.22,15.502) 61.32,15.602 C8.2@61.938,15.602
  S3 w0.25: v1(5.146,15.567) 3.781,15.567 1.27,13.056 1.27,7.893 2.725,6.438 2.725,5.806 2.725,5.655 3.83,4.55 33.936,4.55 34.956,5.57 38.164,5.57 40.334,3.4 41.25,3.4 42.3,2.35 43.14,2.35 v1(43.68,2.89)
  S6 w0.25: v1(5.146,15.567) 5.65,15.063 7.3,15.063 8.737,16.5 9.247,16.5 9.511,16.236 9.967,16.236 10.204,15.999 11.555,15.999 12.287,15.267 13.505,15.267 13.805,15.567 v1(15.636,15.567) 16.086,15.117 17.399,15.117 18.782,16.5 19.692,16.5 19.939,16.253 20.43,16.253 20.705,15.978 21.721,15.978 22.432,15.267 23.949,15.267 24.249,15.567 v1(26.151,15.567) v1(41.676,15.567) 42.126,15.117 43.439,15.117 44.851,16.529 45.853,16.529 46.116,16.265 46.6,16.265 46.916,15.949 48.135,15.949 48.817,15.267 50.057,15.267 50.357,15.567 v1(52.166,15.567) 52.616,15.117 53.93,15.117 55.313,16.5 56.372,16.5 56.607,16.265 57.091,16.265 57.378,15.978 57.6,15.978 58.311,15.267 59.834,15.267 60,15.433 61.151,15.433 v1(61.22,15.502)
  BOTTOM w0.25: C9.2@4.428,15.402 4.981,15.402 v1(5.146,15.567) 5.646,16.067 6.423,16.067 U8.J1@6.473,16.117 ; C10.2@14.918,15.402 15.471,15.402 v1(15.636,15.567) 16.086,16.017 16.863,16.017 U7.J1@16.963,16.117 ; C11.2@40.958,15.402 41.511,15.402 v1(41.676,15.567) 42.176,16.067 42.953,16.067 U6.J1@43.003,16.117 ; C12.2@51.448,15.402 52.001,15.402 v1(52.166,15.567) 52.666,16.067 53.443,16.067 U5.J1@53.493,16.117
  BOTTOM w0.3: X1.164@43.575,1.365 43.575,2.815 43.65,2.89 v1(43.68,2.89)
VTT: C23.2 C24.2 C25.2 C26.2 C27.2 C28.2 C29.2 C56.2 C57.2 RN1.5 RN1.6 RN1.7 RN1.8 RN2.5 RN2.6 RN2.7 RN2.8 RN3.5 RN3.6 RN3.7 RN3.8 RN4.5 RN4.6 RN4.7 RN4.8 RN5.5 RN5.6 RN5.7 RN5.8 RN6.5 RN6.6 RN6.7 RN6.8 RN7.5 RN7.6 RN7.7 RN7.8 X1.258 | length 32.9
  TOP w0.25: RN1.6@65.165,11.963 65.654,11.965 v1(65.908,12.217) 65.654,12.473 RN1.7@65.165,12.471 ; RN3.6@65.165,15.533 65.654,15.535 v1(65.908,15.787) 65.654,16.043 RN3.7@65.165,16.041 ; RN2.6@65.165,18.995 65.654,18.995 v1(65.908,19.249) 65.654,19.503 RN2.7@65.165,19.503 ; RN7.6@65.165,22.745 65.654,22.745 v1(65.908,22.999) 65.654,23.253 RN7.7@65.165,23.253
  TOP w0.3: RN1.5@65.165,11.404 v1(65.908,11.404) ; RN1.8@65.165,13.03 v1(65.908,13.03) ; RN3.5@65.165,14.974 v1(65.908,14.974) ; RN3.8@65.165,16.6 v1(65.908,16.6) ; RN2.5@65.165,18.436 v1(65.908,18.436) ; RN2.8@65.165,20.062 v1(65.908,20.062) ; RN7.5@65.165,22.186 v1(65.908,22.186) ; RN7.8@65.165,23.812 v1(65.908,23.812)
  TOP w0.35: C26.2@65.157,10.5 v1(65.908,10.5) ; C25.2@65.157,14 v1(65.908,14) ; C24.2@65.157,17.53 v1(65.908,17.53) ; C23.2@65.157,21.13 65.907,21.13 v1(65.913,21.136) ; C57.2@65.299,25.469 65.299,24.648 v1(65.336,24.611) ; v1(67.315,3.553) 67.65,3.888 v1(67.65,4.266)
  BOTTOM w0.25: RN4.7@65.165,15.533 65.654,15.535 v1(65.908,15.787) 65.654,16.043 RN4.6@65.165,16.041 ; RN5.7@65.165,18.995 65.654,18.995 v1(65.908,19.249) 65.654,19.503 RN5.6@65.165,19.503 ; RN6.7@65.165,22.745 65.654,22.745 v1(65.908,22.999) 65.654,23.253 RN6.6@65.165,23.253 ; X1.258@67.075,1.365 67.075,2.869 67.144,2.938 67.144,3.382 v1(67.315,3.553)
  BOTTOM w0.3: RN4.8@65.165,14.974 v1(65.908,14.974) ; RN4.5@65.165,16.6 v1(65.908,16.6) ; RN5.8@65.165,18.436 v1(65.908,18.436) ; RN5.5@65.165,20.062 v1(65.908,20.062) ; RN6.8@65.165,22.186 v1(65.908,22.186) ; RN6.5@65.165,23.812 v1(65.908,23.812)
  BOTTOM w0.35: C56.2@64.787,6.98 65.329,6.98 v1(65.898,7.549) ; C29.2@65.157,14 v1(65.908,14) ; C28.2@65.157,17.53 v1(65.908,17.53) ; C27.2@65.157,21.13 65.907,21.13 v1(65.913,21.136)
  other v1: 66.4,8.3 67.15,8.3
ZQ0: R94.2 U1.B9 | length 2.6
  TOP w0.09: R94.2@4.428,9.249 4.941,9.249 6.209,10.517 U1.B9@6.473,10.517
ZQ1: R95.2 U8.B9 | length 2.6
  BOTTOM w0.09: U8.B9@12.873,10.517 13.198,10.517 14.466,9.249 R95.2@14.918,9.249
ZQ2: R96.2 U2.B9 | length 2.6
  TOP w0.09: R96.2@14.918,9.249 15.423,9.249 16.691,10.517 U2.B9@16.963,10.517
ZQ3: R97.2 U7.B9 | length 2.6
  BOTTOM w0.09: U7.B9@23.363,10.517 23.671,10.517 24.939,9.249 R97.2@25.408,9.249
ZQ4: R98.2 U3.B9 | length 2.6
  TOP w0.09: R98.2@40.958,9.249 41.453,9.249 42.721,10.517 U3.B9@43.003,10.517
ZQ5: R99.2 U6.B9 | length 2.6
  BOTTOM w0.09: U6.B9@49.403,10.517 49.679,10.517 50.947,9.249 R99.2@51.448,9.249
ZQ6: R100.2 U4.B9 | length 2.6
  TOP w0.09: R100.2@51.448,9.249 51.914,9.249 53.182,10.517 U4.B9@53.493,10.517
ZQ7: R101.2 U5.B9 | length 2.6
  BOTTOM w0.09: U5.B9@59.893,10.517 60.222,10.517 61.49,9.249 R101.2@61.938,9.249
pads on no net: D1.7 RN1.3 RN4.4 U1.A3 U1.F2 U1.G2 U1.G8 U1.N7 U2.A3 U2.F2 U2.G2 U2.G8 U2.N7 U3.A3 U3.F2 U3.G2 U3.G8 U3.N7 U4.A3 U4.F2 U4.G2 U4.G8 U4.N7 U5.A3 U5.F2 U5.G2 U5.G8 U5.N7 U6.A3 U6.F2 U6.G2 U6.G8 U6.N7 U7.A3 U7.F2 U7.G2 U7.G8 U7.N7 U8.A3 U8.F2 U8.G2 U8.G8 U8.N7 X1.87 X1.88 X1.91 X1.92 X1.95 X1.96 X1.97 X1.100 X1.101 X1.104 X1.105 X1.110 X1.134 X1.157 X1.161 X1.162 X1.165

## Polygon pours and split planes (outlines as drawn)
GND on BOTTOM "BOTTOM-GND" (solid, pour order 48): 134 vertices, not listed, extent -0.35,2.7 68.75,29.751